# Altium PCB MSP430FR5739.PcbDoc
Units mm, origin at the board's own origin, x right, y up, seen from the top; angles counter-clockwise.
Board outline 25 x 25 mm, 6 copper layers (Top Layer, GroundPlane, RL1, RL2, PowerPlane, Bottom Layer); 24 components, 43 nets, 149 pads, 95 vias.
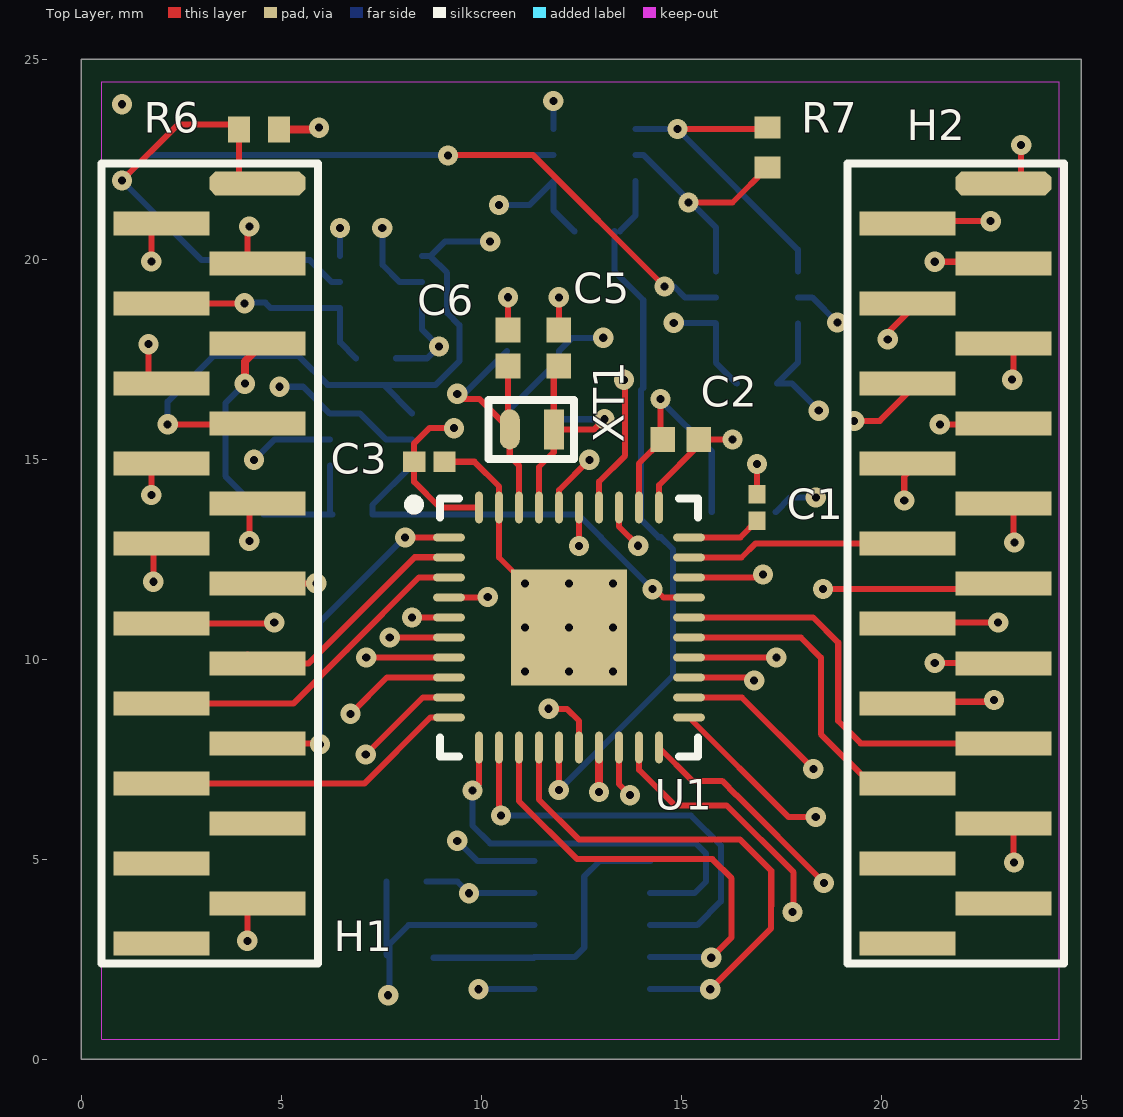
[diagram p0: Top Layer view]
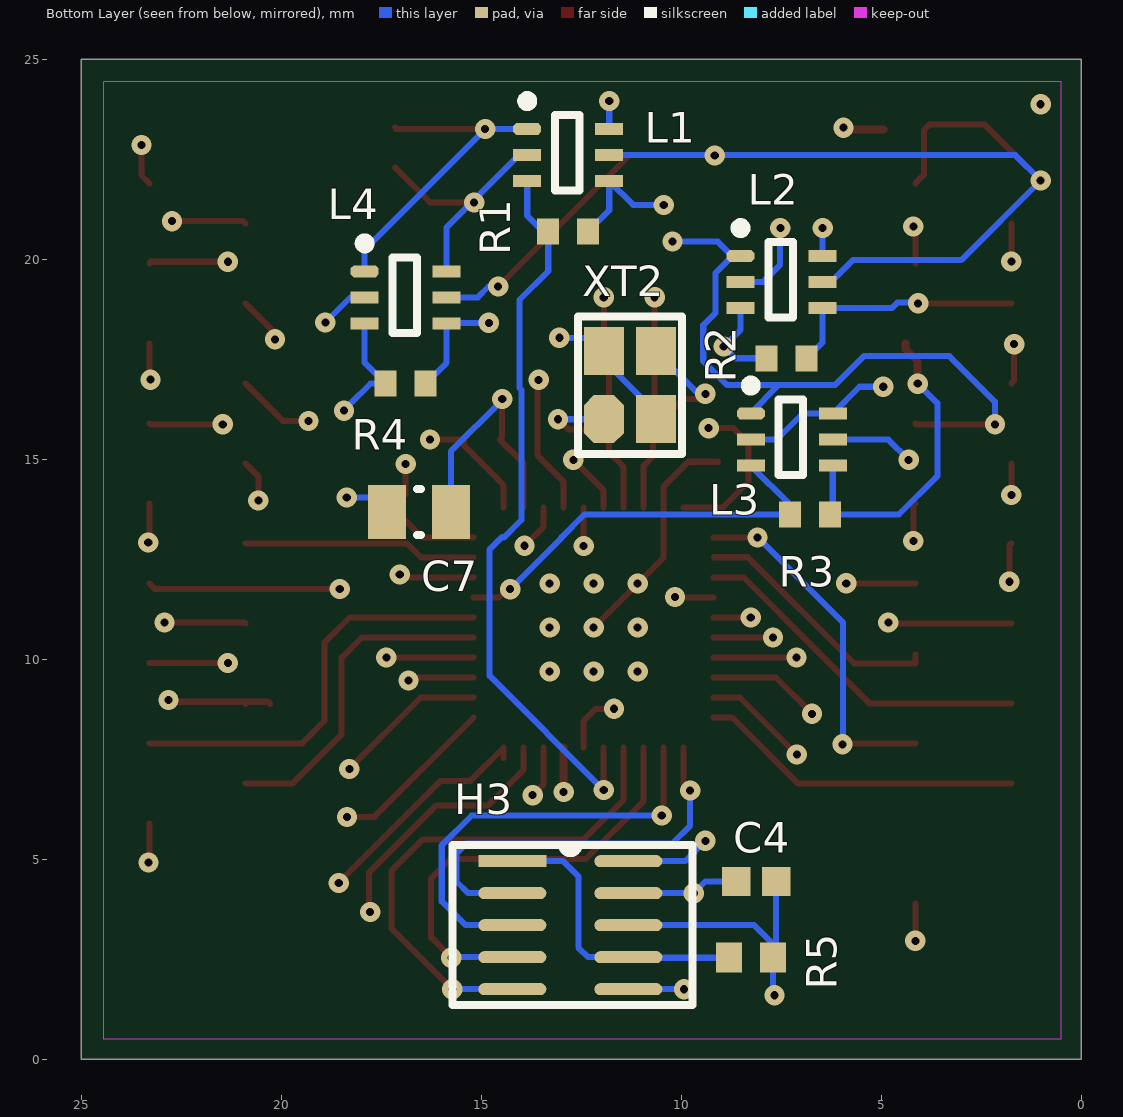
[diagram p1: Bottom Layer view, seen from below]
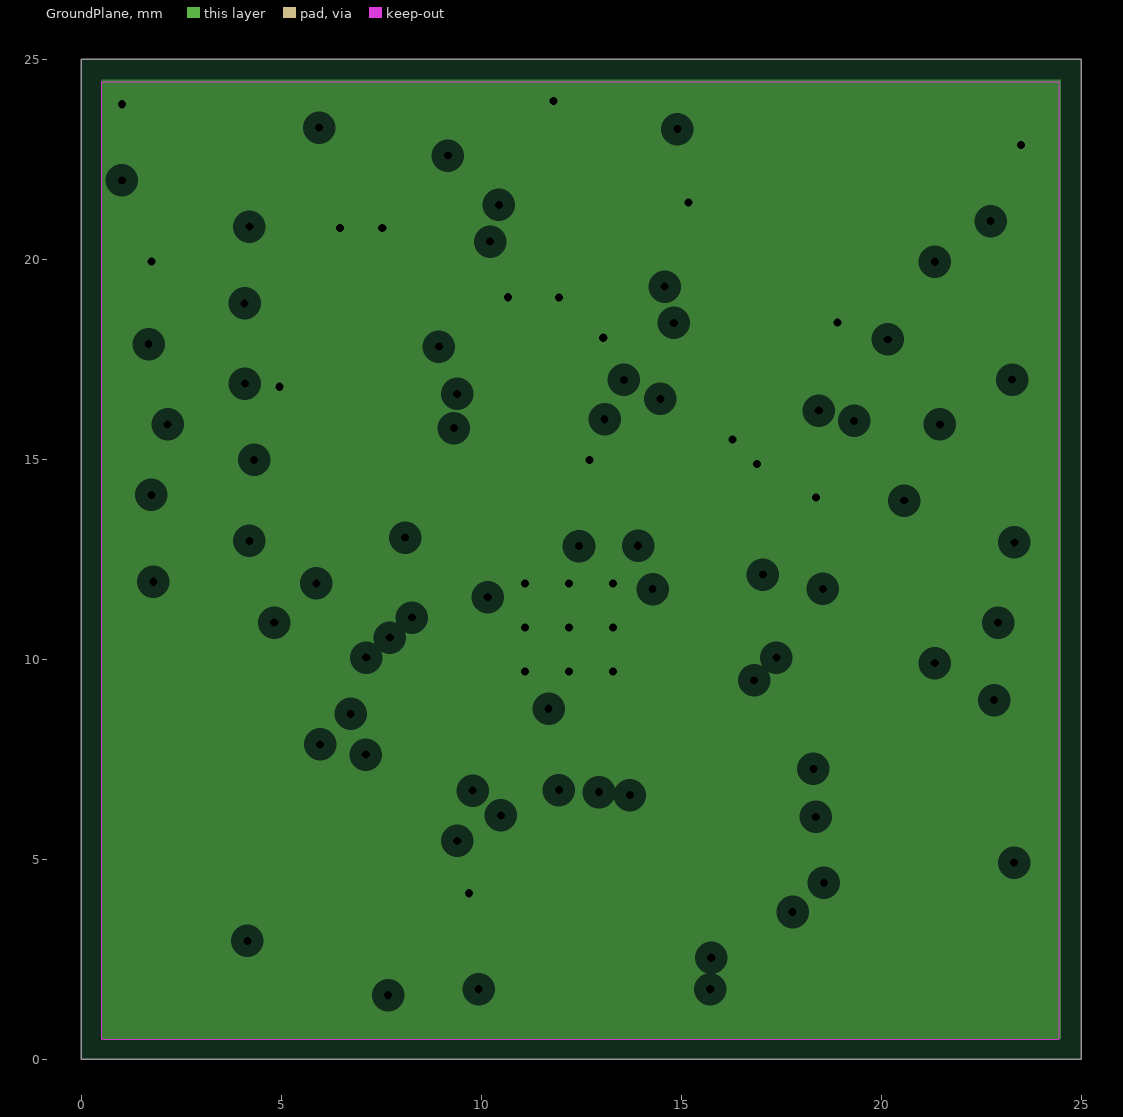
[diagram p2: GroundPlane, clearances drawn from the general rule]
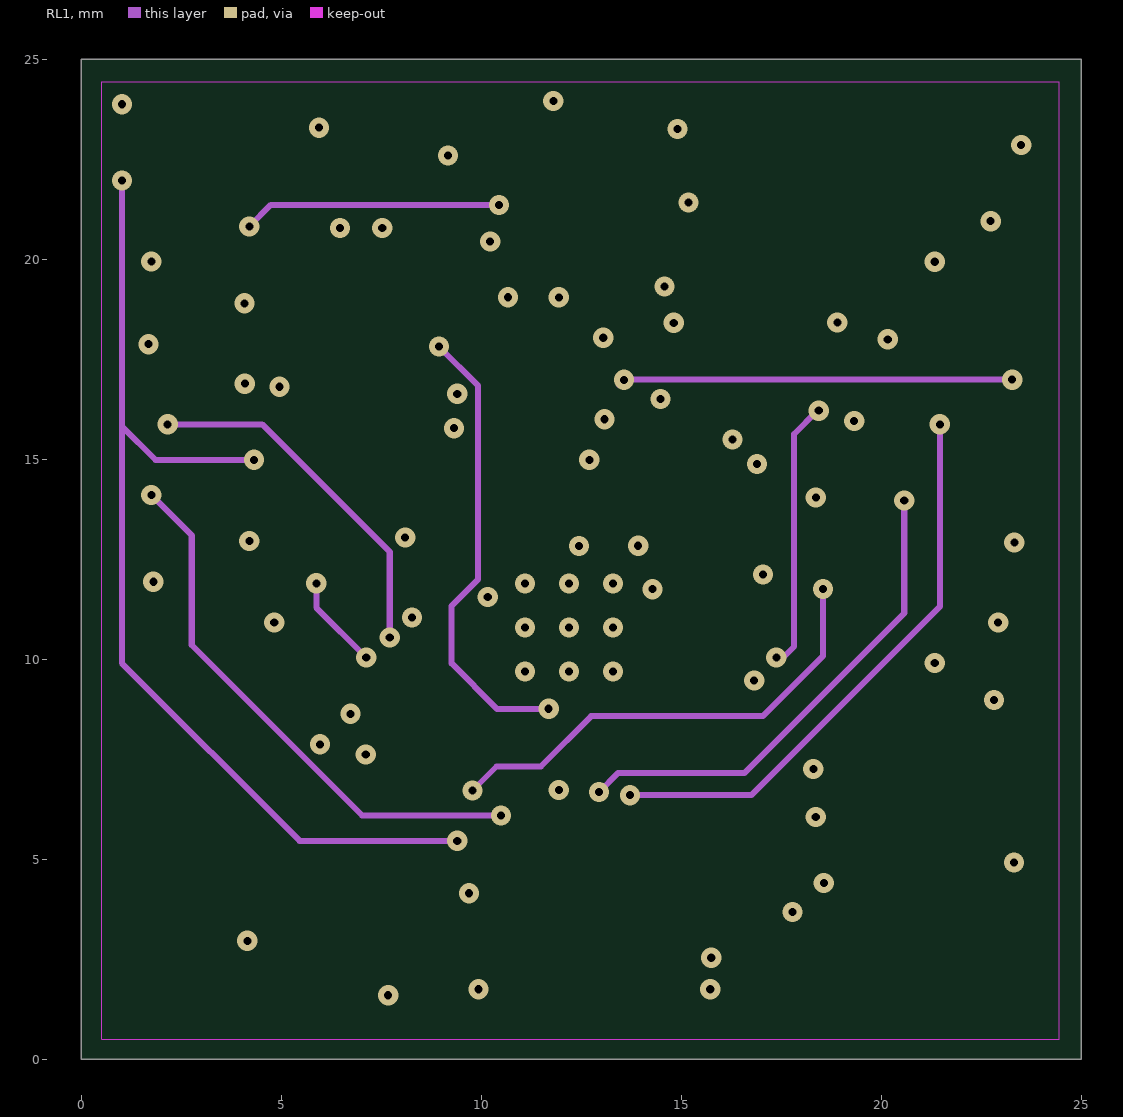
[diagram p3: RL1]
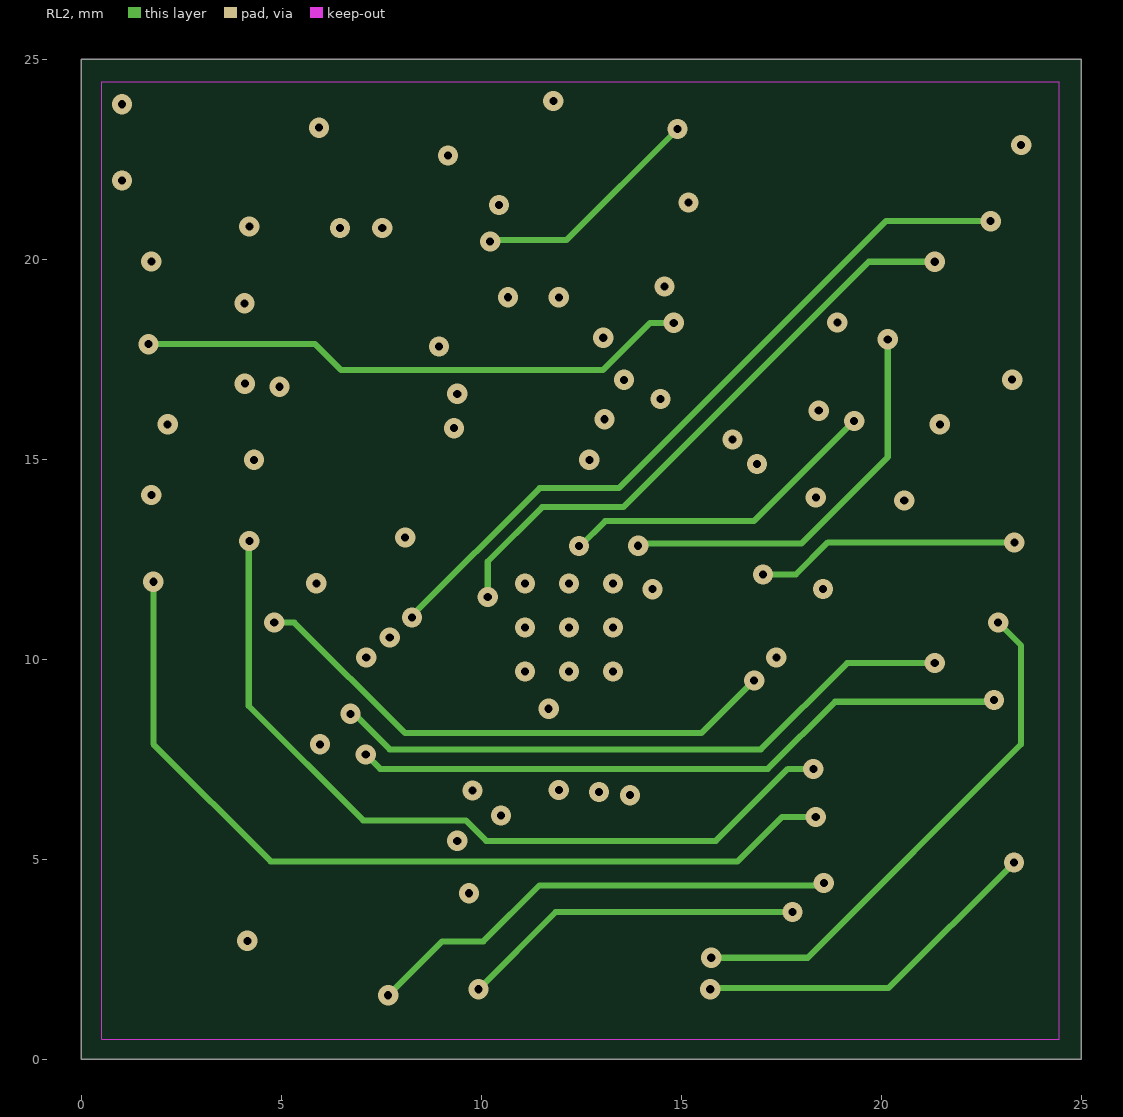
[diagram p4: RL2]
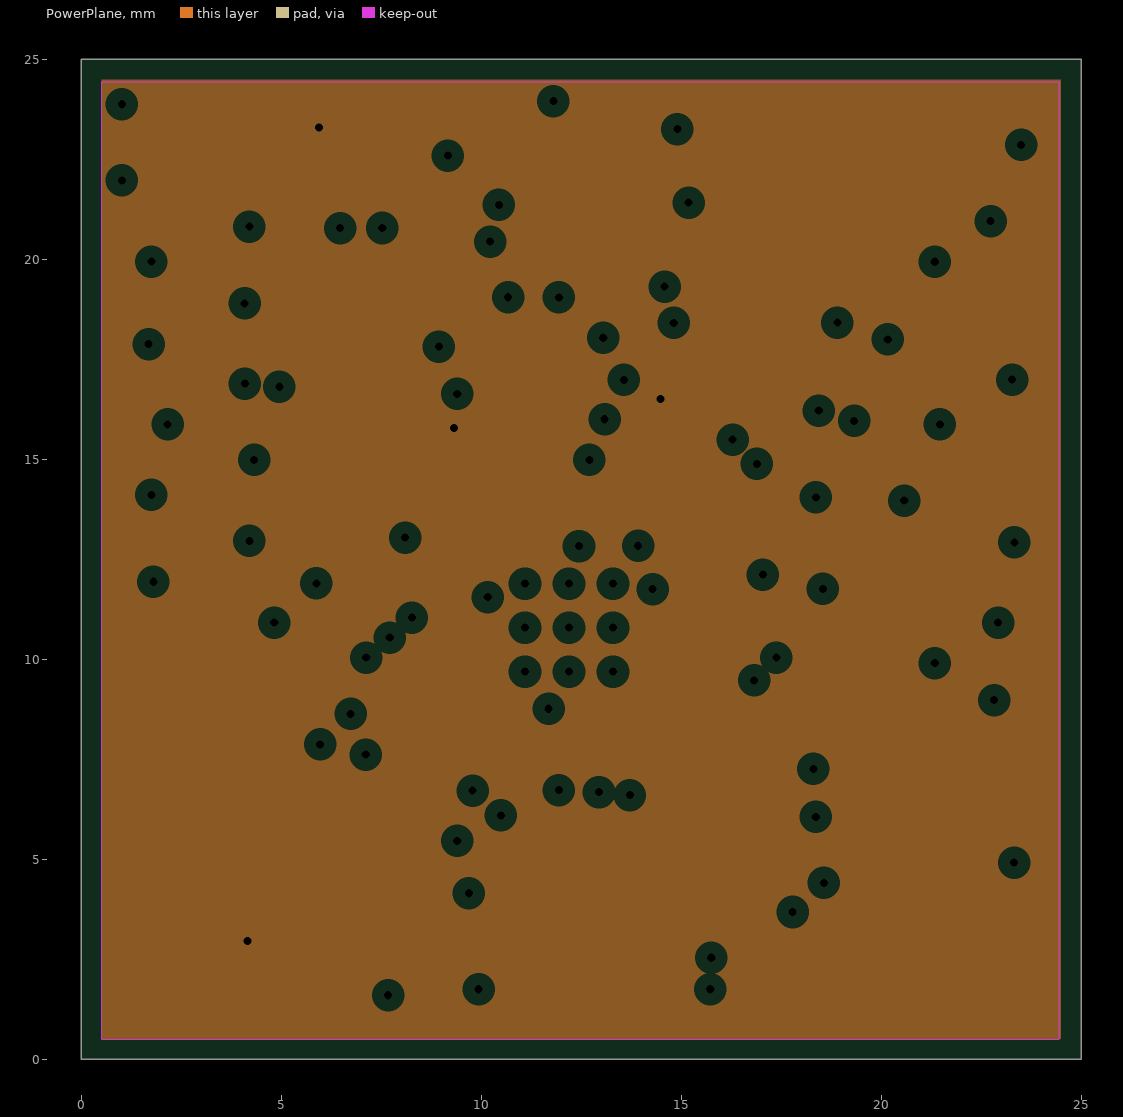
[diagram p5: PowerPlane, clearances drawn from the general rule]

## Layer stack, top to bottom
Top Layer: signal copper 0.0356
Dielectric: core 0.32, FR-4, Dk 4.8
GroundPlane: plane copper 0.0356, net GND
Dielectric: prepreg 0.32, FR-4, Dk 4.8
RL1: signal copper 0.0356
Dielectric: core 0.32, FR-4, Dk 4.8
RL2: signal copper 0.0356
Dielectric: prepreg 0.32, FR-4, Dk 4.8
PowerPlane: plane copper 0.0356, net VCC_MCU
Dielectric: core 0.32, FR-4, Dk 4.8
Bottom Layer: signal copper 0.0356

## Board outline
0,0 25,0 25,25 0,25

## Design rules (kind name [scope] priority, off if disabled: settings)
Clearance "Clearance~Sunstone Circuits" [All] p1: gap=0.152 // Sunstone Circuits Minimum Clearance Rule (MLB~4&6 Layer Designs)
HoleSize "HoleSize~Sunstone Circuits" [All] p1: absolutevalues=TRUE maxlimit=6.375 minlimit=0.203 maxpercent=80.000 minpercent=20.000 // Sunstone Circuits Hole Size Rule (MLB~4&6 Layer Designs)
HoleSize Testpoint [All] p2: absolutevalues=TRUE maxlimit=2.54 minlimit=0.025 maxpercent=80.000 minpercent=20.000
HoleSize TestPointUsage [All] p3: absolutevalues=TRUE maxlimit=2.54 minlimit=0.025 maxpercent=80.000 minpercent=20.000
MinimumAnnularRing "MinimumAnnularRing~Sunstone Circuits" [All] p1: minimumring=0.152 // Sunstone Circuits Minimum Annular Ring (MLB~4&6 Layer Designs)
MinimumSolderMaskSliver [All] p1: minsoldermaskwidth=0.076
PlaneClearance "PlaneClearance~Sunstone Circuits" [All] p1: clearance=0.305 // Sunstone Circuits Power Plane Clearance Rule (MLB~4&6 Layer Designs)
PlaneConnect "PlaneConnect~Sunstone Circuits" [All] p1: planeconnectstyle=Relief reliefexpansion=0.254 reliefentries=4 reliefconductorwidth=0.203 reliefairgap=0.254 // Sunstone Circuits Power Plane Connect Rule (MLB~4&6 Layer Designs)
PolygonConnect "PolygonConnect~Sunstone Circuits" [All] p1: connectstyle=Relief reliefconductorwidth=0.203 reliefentries=4 polygonreliefangle="90 Angle" airgapwidth=0.254 // Sunstone Circuits Polygon Connect Style (MLB~4&6 Layer Designs)
RoutingVias "RoutingVias~Sunstone Circuits" [All] p1: holewidth=0.203 width=0.508 viastyle="Through Hole" minholewidth=0.203 minwidth=0.508 maxholewidth=0.203 maxwidth=0.508 // Sunstone Circuits Routing Vias Rule (MLB~4&6 Layer Designs)
ShortCircuit "ShortCircuit~Sunstone Circuits" [All] p1: allowed=FALSE // Sunstone Circuits Short Circuit Rule~Do Not Allow (MLB~4&6 Layer Designs)
SolderMaskExpansion "SolderMaskExpansion~Sunstone Circuits" [All] p1: expansion=0.076 // Sunstone Circuits Solder Mask Expansion Rule (MLB~4&6 Layer Designs)
ViasUnderSMD "ViasUnderSMD~Sunstone Circuits" [All] p1: allowed=FALSE // Sunstone Circuits Vias Under SMD~Do Not Allow (MLB~4&6 Layer Designs)
Width "Width~Sunstone Circuits" [All] p1: maxlimit=2.54 minlimit=0.152 preferedwidth=0.254 // Sunstone Circuits Minimum Width Rule (MLB~4&6 Layer Designs)
23 further rules are at their usual default settings.

## Components (designator, comment, footprint, x,y, rotation, side; value= is the part's Value field where it differs from the comment)
C1 "CAP 220nF 4V 0201(0603)" CAPC0201(0603)33_N 16.891,13.792 r270 top
C2 "CAP 4.7uF 4V 0402(1005)" CAPC0402(1005)70_N 14.986,15.494 r180 top
C3 "CAP 100nF 4V 0201(0603)" CAPC0201(0603)33_M 8.7,14.94 r180 top
C4 "CAP 2.2uF 4V 0402(1005)" CAPC0402(1005)60_M 8.128,4.445 r180 bottom
C5 "CAP 470nF 4V 0402(1005)" CAPC0402(1005)60_N 11.938,17.78 r270 top
C6 "CAP 470nF 4V 0402(1005)" CAPC0402(1005)60_N 10.668,17.78 r270 top
C7 "CAP 0.5pF 10V 0805(2012)" CAPC0805(2012)75_L 16.56,13.68 r180 bottom
H1 "Bus_Header_1" "MALE SINGLE ROW 20 PIN HEADER" 2,21.9 r0 top
H2 "Bus_Header_2" "MALE SINGLE ROW 20 PIN HEADER" 20.65,21.9 r0 top
H3 "miniJTAG" SMT10PIN_MICRO 14.224,4.953 r180 bottom
L1 "NL17Sg373" SOT65P210X110-6N 12.827,22.606 r180 bottom
L2 "NL17Sg373" SOT65P210X110-6N 7.493,19.431 r180 bottom
L3 "NL17Sg373" SOT65P210X110-6N 7.239,15.494 r180 bottom
L4 "NL17Sg373" SOT65P210X110-6N 16.891,19.05 r180 bottom
R1 "1R 5% 0402(1005)" RESC0402(1005)_N 12.827,20.701 r0 bottom
R2 "1R 5% 0402(1005)" RESC0402(1005)_N 7.366,17.526 r0 bottom
R3 "1R 5% 0402(1005)" RESC0402(1005)_N 6.78,13.62 r0 bottom
R4 "1R 5% 0402(1005)" RESC0402(1005)_N 16.891,16.891 r0 bottom
R5 "47K 5% 0402(1005)" RESC0402(1005)_M 8.255,2.54 r180 bottom
R6 "1R 5% 0402(1005)" RESC0402(1005)_N 4.445,23.241 r180 top
R7 "1R 5% 0402(1005)" RESC0402(1005)_N 17.16,22.8 r270 top
U1 "MSP430FR5739IRHAR" Via_modified_TI-RHA40-2900X2900TP_N 12.192,10.795 r0 top
XT1 "XTAL" CRYSTAL_32 11.811,15.748 r180 top
XT2 "XTAL_4pin" CRYSTAL_MHZ 11.938,16.002 r90 bottom

## Footprints (in the part's own frame and the unit in brackets; to place one, negate y for a bottom-side part, rotate by r counter-clockwise, add the part's x,y. Pads: shape width x height; smd on the part's side, far side on the other; paste and mask are expansions set on the pad)
CAPC0201(0603)33_M [mm] "Chip Capacitor, Body 0.6x0.3mm, Height 0.33mm, IPC Low Density"
  rect 0.56x0.52 smd mask+0.102: 1(-0.38,0) 2(0.38,0)
  body extent -0.31,-0.17 0.32,0.16, height 0.33
CAPC0201(0603)33_N [mm] "Chip Capacitor, Body 0.6x0.3mm, Height 0.33mm, IPC Medium Density"
  rect 0.46x0.42 smd mask+0.102: 1(-0.33,0) 2(0.33,0)
  body extent -0.31,-0.16 0.32,0.17, height 0.33
CAPC0402(1005)60_M [mm] "Chip Capacitor, Body 1.0x0.5mm, Height 0.6mm, IPC Low Density"
  rect 0.72x0.72 smd: 1(-0.5,0) 2(0.5,0)
  body extent -0.55,-0.3 0.55,0.3, height 0.6
CAPC0402(1005)60_N [mm] "Chip Capacitor, Body 1.0x0.5mm, Height 0.6mm, IPC Medium Density"
  rect 0.62x0.62 smd: 1(-0.45,0) 2(0.45,0)
  body extent -0.55,-0.3 0.55,0.3, height 0.6
CAPC0402(1005)70_N [mm] "Chip Capacitor, Body 1.0x0.5mm, Height 0.7mm, IPC Medium Density"
  rect 0.62x0.62 smd: 1(-0.45,0) 2(0.45,0)
  body extent -0.55,-0.3 0.55,0.3, height 0.7
CAPC0805(2012)75_L [mm] "Chip Capacitor, Body 2.0x1.2mm, Height 0.75mm, IPC High Density"
  rect 0.95x1.35 smd: 1(-0.8,0) 2(0.8,0)
  silkscreen extent -0.05,-0.58 0.05,0.58, body extent -1.1,-0.72 1.1,0.72, height 0.75
CRYSTAL_32 [mm]
  rect 0.5x1 smd: 1(0,0)
  oval 0.5x1 smd: 2(1.1,0)
  silkscreen extent -0.51,-0.74 1.63,0.74
CRYSTAL_MHZ [mm]
  oct 1.2x1 smd: 1(0,0)
  rect 1.2x1 smd: 2(0,-1.3) 3(1.7,-1.3) 4(1.7,0)
  silkscreen extent -0.86,-1.95 2.57,0.65
"MALE SINGLE ROW 20 PIN HEADER" [mm]
  oct 2.4x0.6 smd: 1(2.4,0)
  rect 2.4x0.6 smd: 2(0,-1) 3(2.4,-2) 4(0,-3) 5(2.4,-4) 6(0,-5) 7(2.4,-6) 8(0,-7) 9(2.4,-8) 10(0,-9) 11(2.4,-10) 12(0,-11) 13(2.4,-12) 14(0,-13) 15(2.4,-14) 16(0,-15) 17(2.4,-16) 18(0,-17) 19(2.4,-18) 20(0,-19)
  silkscreen extent -1.5,-19.5 3.91,0.5
RESC0402(1005)_M [mm] "Chip Resistor, Body 1.0x0.5mm, IPC Low Density"
  rect 0.65x0.75 smd: 1(-0.55,0) 2(0.55,0)
  body extent -0.52,-0.28 0.53,0.28, height 0.4
RESC0402(1005)_N [mm] "Chip Resistor, Body 1.0x0.5mm, IPC Medium Density"
  rect 0.55x0.65 smd: 1(-0.5,0) 2(0.5,0)
  body extent -0.52,-0.27 0.53,0.28, height 0.4
SMT10PIN_MICRO [mm]
  rect 1.7x0.3 smd: 1(0,0)
  oval 1.7x0.3 smd: 2(0,-0.8) 3(0,-1.6) 4(0,-2.4) 5(0,-3.2) 6(2.9,-3.2) 7(2.9,-2.4) 8(2.9,-1.6) 9(2.9,-0.8) 10(2.9,0)
  silkscreen extent -1.5,-3.6 4.5,0.4
SOT65P210X110-6N [mm] "SOT23, 6-Leads, Body 2.00x2.10mm, Pitch 0.65mm, IPC Medium Density"
  oct 0.7x0.3 smd: 1(-1.025,0.65)
  rect 0.7x0.3 smd: 2(-1.025,0) 3(-1.025,-0.65) 4(1.025,-0.65) 5(1.025,0) 6(1.025,0.65)
  silkscreen extent -1.15,-0.89 0.28,1.47, body extent -0.67,-1.1 0.67,1.1, height 1.1
Via_modified_TI-RHA40-2900X2900TP_N [mm] "QFN, 40-Leads, Body 6x6mm, Pitch 0.5mm, Thermal Pad 2.9x2.9mm, IPC Medium Density"
  oval 0.8x0.2 smd: 1(-3,2.25) 2(-3,1.75) 3(-3,1.25) 4(-3,0.75) 5(-3,0.25) 6(-3,-0.25) 7(-3,-0.75) 8(-3,-1.25) 9(-3,-1.75) 10(-3,-2.25) 21(3,-2.25) 22(3,-1.75) 23(3,-1.25) 24(3,-0.75) 25(3,-0.25) 26(3,0.25) 27(3,0.75) 28(3,1.25) 29(3,1.75) 30(3,2.25)
  oval 0.2x0.8 smd: 11(-2.25,-3) 12(-1.75,-3) 13(-1.25,-3) 14(-0.75,-3) 15(-0.25,-3) 16(0.25,-3) 17(0.75,-3) 18(1.25,-3) 19(1.75,-3) 20(2.25,-3) 31(2.25,3) 32(1.75,3) 33(1.25,3) 34(0.75,3) 35(0.25,3) 36(-0.25,3) 37(-0.75,3) 38(-1.25,3) 39(-1.75,3) 40(-2.25,3)
  rect 2.9x2.9 smd: 41(0,0)
  silkscreen extent -4,-3.22 3.22,3.22, body extent -3.08,-3.08 3.08,3.08, height 1

## Part data
C1: library part CMP-1033-00669-1, "CAP 220nF 4V ±20% 0201 (0603 Metric) Thickness 0.33mm SMD"
C2: library part CMP-1034-02135-1, "CAP 10uF 4V ±20% 0402 (1005 Metric) Thickness 0.7mm SMD"
C3: library part CMP-1033-00657-1, "CAP 100nF 4V ±10% 0201 (0603 Metric) Thickness 0.33mm SMD"
C4: library part CMP-1034-02124-1, "CAP 2.2uF 4V ±20% 0402 (1005 Metric) Thickness 0.6mm SMD"
C5 C6: library part CMP-1034-02101-1, "CAP 470nF 4V ±10% 0402 (1005 Metric) Thickness 0.6mm SMD"
C7: library part CMP-1036-00001-1, "CAP 0.5pF 10V ±0.1pF 0805 (2012 Metric) Thickness 0.75mm SMD"
R1 R2 R3 R4 R6 R7: library part CMP-1011-00002-1, "1R 0.063W 5% 0402 (1005 Metric)  SMD"
R5: library part CMP-1011-00114-1, "47K 0.063W 5% 0402 (1005 Metric)  SMD"
U1: library part CMP-0365-01094-1, "24 MHz Mixed Signal Microcontroller, 1024 B SRAM and 33 GPIOs, -40 to 85 degC, 40-pin QFN (RHA), Green (RoHS & no Sb/Br)"

## Via types
v1: diameter 0.508, hole 0.203, Top Layer to Bottom Layer, 95 vias

## Nets (pads, with @x,y where several pads share a name; then routed paths per layer and width w, separated by ;. In a path a pad name is that pad's centre, name@x,y a point inside that pad or via, vN(x,y) a via of type N, cw(c..) or ccw(c..) an arc to the next point about the centre after c; other vN are vias at no path point)
EH_VCC: H1.1 H3.10 L1.5 L2.5 L3.5 L4.5 R6.2 | length 60.9
  Top Layer w0.152: v1(1.016,21.971) 2.413,23.368 3.802,23.368 3.937,23.233 3.937,22.113 H1.1@4.15,21.9 ; v1(9.166,22.595) 9.175,22.604 11.296,22.604 v1(14.58,19.32)
  RL1 w0.152: v1(1.016,21.971) 1.016,15.824 ; v1(4.318,14.986) 1.854,14.986 1.016,15.824 ; v1(9.398,5.461) 5.461,5.461 1.016,9.906 1.016,15.824
  Bottom Layer w0.152: v1(4.318,14.986) 4.826,15.494 L3.5 ; L2.5 6.261,19.431 5.712,19.98 3.007,19.98 v1(1.016,21.971) 1.651,22.606 L1.5 ; v1(9.398,5.461) 9.906,4.953 H3.10 ; v1(14.58,19.32) 14.82,19.32 15.09,19.05 L4.5
GND: C1.1 C2.1 C3.1 C4.1 C5.1 C6.1 C7.1 H1.2 H2.1 H3.9 L1.2 L1.6 L2.2 L2.6 L3.2 L3.6 L4.2 L4.6 R7.2 U1.31 U1.36 U1.39 U1.41 XT2.2 XT2.4 | length 37.6
  Top Layer w0.152: v1(1.75,19.944) H1.2@1.75,20.9 ; v1(6.468,20.781) v1@6.523,20.836 ; C3.1 9.825,14.94 10.442,14.323 U1.39 10.442,12.545 v1(11.092,11.895) v1(12.192,10.795) ; C6.1 v1(10.668,19.052) ; C5.1 v1(11.938,19.048) ; U1.36 11.942,14.228 v1(12.7,14.986) ; U1.31 14.442,14.356 15.436,15.35 C2.1 v1(16.281,15.494) ; v1(15.18,21.42) 16.28,21.42 R7.2 ; C1.1 16.891,14.681 v1(16.891,14.884) ; v1@18.313,14.046 v1(18.364,14.046) ; H2.1@23.3,21.9 23.495,22.095 v1(23.495,22.86)
  RL1 w0.152: v1@10.666,19.054 v1(10.668,19.052) ; v1@11.887,19.099 v1(11.938,19.048) ; v1(16.891,14.884) v1@16.916,14.91
  Bottom Layer w0.152: v1(4.953,16.815) 5.543,16.815 ; 5.558,16.8 L3.6 6.97,16.144 7.62,15.494 L3.2 ; L2.6 v1(6.468,20.781) ; v1(7.523,20.783) 7.53,20.776 7.53,19.863 7.962,19.431 L2.2 ; C4.1 9.398,4.445 v1(9.69,4.153) H3.9 ; XT2.2 10.638,16.178 11.938,17.478 XT2.4 12.272,18.036 v1@13.233,18.036 ; L1.6 v1(11.802,23.956) ; v1(13.049,18.038) v1@13.231,18.038 ; L1.2 14.059,22.606 15.866,20.799 L4.6 ; C7.1 17.726,14.046 v1(18.364,14.046) ; L4.2 18.27,19.05 v1(18.9,18.42)
  other v1: 11.092,9.695 12.192,9.695 13.292,9.695 11.092,10.795 13.292,10.795 12.192,11.895 13.292,11.895 1.016,23.876
N10: H1.15 U1.1 | length 9.5
  Top Layer w0.152: H1.15@4.15,7.9 H1.15 5.943,7.9 v1(5.969,7.874) ; v1@8.293,13.045 U1.1
  Bottom Layer w0.152: v1(5.969,7.874) 5.962,7.881 5.962,10.924 7.998,12.96 8.16,12.96 8.235,13.035 8.25,13.035 8.218,13.067 7.995,13.067 8.076,12.985 8.149,12.985 8.1,13.034 8.1,13.039 v1(8.095,13.044)
N11: H1.13 U1.2 | length 6.4
  Top Layer w0.152: H1.13@4.15,10.119 4.15,9.9 H1.13 5.683,9.9 8.335,12.552 U1.2@9.185,12.552
N12: H1.14 U1.3 | length 8.8
  Top Layer w0.152: H1.14@1.75,8.9 H1.14 5.306,8.9 6.64,10.234 6.64,10.245 8.44,12.045 U1.3
N13: H2.13 U1.8 | length 20.7
  Top Layer w0.152: v1(6.731,8.636) 7.64,9.545 U1.8 ; v1(21.336,9.906) H2.13@23.294,9.906
  RL2 w0.152: v1(6.731,8.636) 6.821,8.636 7.71,7.747 16.987,7.747 19.146,9.906 v1(21.336,9.906)
N14: H2.14 U1.9 | length 22.5
  Top Layer w0.152: v1(7.112,7.62) 8.537,9.045 U1.9 ; H2.14@20.28,8.89 20.33,8.94 20.65,8.94 22.98,8.94 22.939,8.981 v1(22.819,8.981) ; H2.14@20.89,8.89 H2.14@20.9,8.9
  RL2 w0.152: v1(7.112,7.62) 7.472,7.26 17.166,7.26 18.846,8.94 22.98,8.94 22.939,8.981 v1(22.819,8.981)
N15: H1.16 U1.10 | length 8.1
  Top Layer w0.152: H1.16@1.75,6.9 H1.16 7.084,6.9 8.729,8.545 U1.10
N16: H2.9 U1.28 | length 9.5
  Top Layer w0.152: U1.28 16.965,12.045 v1(17.04,12.12) ; H2.9@23.3,13.9 23.3,12.948 v1(23.326,12.922)
  RL2 w0.152: v1(17.04,12.12) 17.86,12.12 18.662,12.922 v1@23.313,12.922 ; v1(23.326,12.922) v1@23.313,12.922 ; v1@23.351,12.96 v1@23.313,12.922
N17: H2.10 U1.29 | length 5.9
  Top Layer w0.152: U1.29 16.505,12.545 16.86,12.9 H2.10 H2.10@20.9,12.9
N20: H1.10 U1.21 | length 27.5
  Top Layer w0.152: H1.10@1.75,12.9 1.8,12.85 v1(1.8,11.94) ; U1.21 17.677,6.06 v1(18.36,6.06)
  RL2 w0.152: v1(1.8,11.94) 1.8,7.882 4.733,4.949 16.409,4.949 17.52,6.06 v1(18.36,6.06)
N21: H1.9 U1.22 | length 25.2
  Top Layer w0.152: H1.9@4.15,13.9 4.2,13.85 v1(4.2,12.96) ; U1.22 16.515,9.045 v1(18.3,7.26)
  RL2 w0.152: v1(4.2,12.96) 4.187,12.947 4.187,8.833 7.047,5.973 9.61,5.973 10.124,5.46 15.864,5.46 17.664,7.26 v1(18.3,7.26)
N22: H1.12 U1.23 | length 18.5
  Top Layer w0.152: H1.12@1.75,10.9 H1.12 4.594,10.9 4.699,10.795 v1(4.823,10.919) ; U1.23 16.6,9.545 16.672,9.472 v1(16.82,9.472)
  RL2 w0.152: v1(4.823,10.919) 5.329,10.919 8.095,8.153 15.501,8.153 v1(16.82,9.472)
N23: H2.5 U1.34 | length 14.6
  Top Layer w0.152: U1.34 12.942,14.442 13.593,15.093 13.593,16.767 13.5,16.86 13.44,16.86 v1(13.566,16.986) ; v1@23.3,17 H2.5@23.3,17.9
  RL1 w0.152: v1(13.566,16.986) 13.44,16.86 13.5,16.86 13.633,16.993 v1(23.27,16.993)
N24: H2.6 U1.35 | length 11.1
  Top Layer w0.152: v1(12.442,12.831) U1.35 ; v1(19.32,15.96) 19.96,15.96 H2.6@20.9,16.9
  RL2 w0.152: v1@12.48,12.84 13.094,13.454 16.814,13.454 v1(19.32,15.96)
N25: H2.8 U1.17 | length 14.5
  Top Layer w0.152: v1(20.574,13.97) 20.574,14.574 H2.8@20.9,14.9
  Top Layer w0.2: v1(12.942,6.682) U1.17
  RL1 w0.152: v1(12.942,6.682) 13.421,7.161 16.581,7.161 20.574,11.154 v1(20.574,13.97)
  RL1 w0.2: v1(12.942,6.682) v1@12.968,6.656
N26: H2.7 U1.18 | length 17.4
  Top Layer w0.152: U1.18 13.442,6.878 v1(13.716,6.604) ; v1(21.463,15.875) 23.275,15.875 H2.7@23.3,15.9
  RL1 w0.152: v1(13.716,6.604) 16.749,6.604 21.463,11.318 v1(21.463,15.875)
N27: H2.4 U1.33 | length 12.5
  Top Layer w0.152: U1.33 13.442,13.318 v1(13.92,12.84) ; v1(20.16,18) 20.16,18.16 H2.4@20.9,18.9
  RL2 w0.152: v1(13.92,12.84) 13.972,12.892 17.998,12.892 20.16,15.055 v1(20.16,18)
N30: H2.3 U1.4 | length 18.1
  Top Layer w0.152: U1.4 10.148,11.545 v1(10.16,11.557) ; v1(21.336,19.939) 23.261,19.939 H2.3@23.3,19.9
  RL2 w0.152: v1(10.16,11.557) 10.16,12.446 11.52,13.806 13.552,13.806 19.685,19.939 v1(21.336,19.939)
N31: H2.2 U1.5 | length 21.4
  Top Layer w0.152: v1(8.266,11.045) U1.5 ; H2.2@20.9,20.9 20.955,20.955 v1(22.733,20.955)
  RL2 w0.152: v1(8.266,11.045) 8.266,11.085 11.46,14.28 13.44,14.28 20.115,20.955 v1(22.733,20.955)
N32: H1.7 L1.1 L2.1 L3.1 L4.1 R7.1 U1.6 | length 41.3
  Top Layer w0.152: v1(2.159,15.875) 4.125,15.875 H1.7@4.15,15.9 ; v1(7.71,10.545) U1.6 ; v1(14.904,23.256) 17.116,23.256 R7.1
  RL1 w0.152: v1(2.159,15.875) 4.52,15.875 7.71,12.685 v1(7.71,10.545) v1@7.634,10.469
  RL2 w0.152: v1(10.222,20.444) 10.184,20.444 10.221,20.481 12.129,20.481 v1(14.904,23.256)
  Bottom Layer w0.152: v1(2.159,15.875) 2.159,16.439 3.3,17.58 5.435,17.58 6.155,16.86 7.56,16.86 ; L3.1 8.264,16.156 7.56,16.86 ; L2.1 L2.1@8.725,20.081 ; v1(10.222,20.444) 9.088,20.444 L2.1@8.725,20.081 ; L1.1 v1(14.904,23.256) 17.916,20.244 L4.1 ; 7.56,16.86 8.859,16.86 9.452,17.453 9.452,18.354 9.144,18.663 9.144,19.662 L2.1@8.725,20.081
N33: H1.11 U1.7 | length 6.2
  Top Layer w0.152: H1.11@4.15,11.9 H1.11 v1(5.875,11.9) ; v1(7.122,10.045) U1.7
  RL1 w0.152: v1(5.875,11.9) 5.875,11.292 v1(7.122,10.045)
N34: H1.6 L4.4 R4.1 | length 17.7
  Top Layer w0.152: v1(1.68,17.88) 1.68,16.97 H1.6@1.75,16.9
  RL2 w0.152: v1(1.68,17.88) 5.845,17.88 6.497,17.229 13.038,17.229 14.219,18.41 v1(14.81,18.41)
  Bottom Layer w0.152: v1(14.81,18.41) L4.4@15.856,18.41 ; L4.4 15.866,17.416 R4.1
N35: H2.16 U1.25 | length 8.3
  Top Layer w0.152: U1.25 17.985,10.545 18.491,10.039 18.491,8.128 19.719,6.9 H2.16 H2.16@20.9,6.9
N36: H2.15 U1.26 | length 10.6
  Top Layer w0.152: U1.26 18.295,11.045 18.923,10.417 18.923,8.458 19.481,7.9 H2.15 H2.15@23.3,7.9
N37: H1.5 L3.4 R3.1 | length 8
  Top Layer w0.2: v1(4.089,16.891) 4.089,17.45 4.4,17.76 H1.5
  Bottom Layer w0.152: v1(4.089,16.891) 3.6,16.402 3.6,14.58 4.56,13.62 R3.1 6.214,13.686 L3.4
N40: H1.3 L1.4 R1.1 | length 10.5
  Top Layer w0.152: H1.3@4.15,19.9 4.15,20.77 v1(4.2,20.82)
  RL1 w0.152: v1(4.2,20.82) 4.74,21.36 v1(10.44,21.36)
  Bottom Layer w0.152: v1(10.44,21.36) 11.206,21.36 L1.4 11.802,21.226 R1.1
N41: H1.4 L2.4 R2.1 | length 6.3
  Top Layer w0.152: H1.4@1.75,18.9 H1.4 v1(4.08,18.9)
  Bottom Layer w0.152: v1(4.08,18.9) v1@4.198,18.782 ; v1@4.098,18.918 4.599,18.918 4.736,18.781 L2.4 6.468,17.924 R2.1
N42: H2.11 H3.2 U1.11 | length 27
  Top Layer w0.152: v1(9.78,6.72) 9.942,6.882 U1.11 ; v1(18.54,11.76) 23.16,11.76 H2.11@23.3,11.9
  RL1 w0.152: v1(9.78,6.72) 10.38,7.32 11.486,7.32 12.746,8.58 17.04,8.58 18.54,10.08 v1(18.54,11.76)
  Bottom Layer w0.152: v1(9.78,6.72) 9.78,5.841 10.221,5.4 15.36,5.4 15.621,5.139 15.621,4.445 15.329,4.153 H3.2
N43: H1.8 H3.3 U1.12 | length 25
  Top Layer w0.152: v1@1.68,14.04 v1(1.75,14.11) H1.8@1.75,14.9 ; 10.442,6.358 U1.12
  RL1 w0.152: v1(1.75,14.11) 2.76,13.1 2.76,10.358 7.022,6.096 v1(10.49,6.096) v1@10.541,6.096
  Bottom Layer w0.152: v1@10.704,6.096 15.24,6.096 15.988,5.348 15.988,3.949 15.393,3.353 H3.3
N44: H2.12 H3.4 U1.13 | length 26.4
  Top Layer w0.152: U1.13 10.942,6.457 12.395,5.004 15.773,5.004 16.256,4.521 16.256,3.048 v1(15.748,2.54) ; H2.12@20.9,10.9 20.92,10.92 v1(22.92,10.92)
  RL2 w0.152: v1(15.748,2.54) 18.161,2.54 23.492,7.871 23.492,10.348 v1(22.92,10.92)
  Bottom Layer w0.152: H3.4 15.735,2.553 v1(15.748,2.54)
N45: H2.17 H3.5 U1.14 | length 22.9
  Top Layer w0.152: U1.14 11.442,6.492 12.437,5.497 16.465,5.497 17.248,4.714 17.248,3.834 17.247,3.833 17.247,3.277 v1(15.723,1.753) ; v1@23.3,4.939 H2.17@23.3,5.9 ; v1(23.319,4.92) v1@23.46,4.92
  RL2 w0.152: v1@15.749,1.779 20.178,1.779 v1(23.319,4.92)
  Bottom Layer w0.152: H3.5 v1(15.723,1.753)
N46: C5.2 U1.37 XT1.1 XT2.1 | length 6.3
  Top Layer w0.152: U1.37 11.442,14.808 11.811,15.177 XT1.1 ; C5.2 11.811,17.203 XT1.1 ; v1(13.081,16.002) 12.827,15.748 XT1.1
  Bottom Layer w0.152: XT2.1 v1(13.081,16.002)
N47: C6.2 U1.38 XT1.2 XT2.3 | length 7
  Top Layer w0.152: v1(9.398,16.637) 9.525,16.51 9.949,16.51 XT1.2@10.668,15.791 ; C6.2 XT1.2@10.668,15.791 ; U1.38 10.942,14.839 10.711,15.07 XT1.2 XT1.2@10.668,15.791
  Bottom Layer w0.152: v1(9.398,16.637) 9.573,16.637 XT2.3
PN34: L4.3 R4.2 U1.24 | length 11.8
  Top Layer w0.152: U1.24 v1(17.375,10.045)
  RL1 w0.152: v1(17.375,10.045) 17.46,9.96 17.82,10.32 17.82,15.613 ; 17.819,15.633 18.402,16.216 v1(18.435,16.216)
  Bottom Layer w0.152: L4.3 17.916,17.416 R4.2 17.771,16.891 v1@18.276,16.386
PN37: L3.3 R3.2 U1.27 | length 10.4
  Top Layer w0.152: v1(14.28,11.755) 14.345,11.755 14.555,11.545 U1.27
  Bottom Layer w0.152: L3.3 7.28,13.86 R3.2 12.425,13.62 12.992,13.052 12.992,13.043 v1(14.28,11.755)
PN40: L1.3 R1.2 U1.15 | length 18.3
  Top Layer w0.152: v1(11.938,6.731) 11.942,6.735 U1.15
  RL1 w0.152: v1(11.938,6.731) 11.954,6.731 v1@11.962,6.723
  Bottom Layer w0.152: v1(11.938,6.731) 14.792,9.585 14.792,12.748 14.488,13.052 14.432,13.052 13.995,13.489 13.995,16.733 14.049,16.786 14.049,18.983 13.327,19.705 R1.2 ; R1.2@13.462,20.701 13.852,21.091 L1.3
PN41: L2.3 R2.2 U1.16 | length 15.4
  Top Layer w0.152: v1(11.684,8.763) 12.14,8.763 12.442,8.461 U1.16
  RL1 w0.152: v1(8.94,17.82) 9.92,16.84 9.92,11.999 9.258,11.337 9.258,9.897 10.391,8.763 v1(11.684,8.763) v1@11.68,8.767
  Bottom Layer w0.152: R2.2 8.646,17.526 v1(8.94,17.82) 8.518,18.242 L2.3
RST: C4.2 H3.8 R5.2 U1.20 | length 24.8
  Top Layer w0.152: U1.20@14.442,7.529 U1.20 15.277,6.96 16.018,6.96 16.373,6.604 16.383,6.604 v1@18.479,4.508
  RL2 w0.152: v1(7.671,1.6) 9.018,2.948 10.053,2.948 11.451,4.346 18.502,4.346 v1(18.564,4.408)
  Bottom Layer w0.152: C4.2 7.628,2.617 R5.2 ; v1(7.671,1.6) 7.705,1.634 R5.2 ; H3.8 8.179,3.353 7.705,2.879 R5.2
TST: H3.6 U1.19 | length 16.6
  Top Layer w0.152: v1@9.906,1.778 v1(9.931,1.753) ; U1.19 13.942,7.239 14.831,6.35 16.129,6.35 17.805,4.674 17.805,3.708 v1(17.78,3.683)
  RL2 w0.152: v1(9.931,1.753) 11.861,3.683 v1(17.78,3.683)
  Bottom Layer w0.152: v1(9.931,1.753) H3.6
UIF_VCC: H3.1 H3.7 R5.1 | length 7.5
  Bottom Layer w0.152: R5.1 11.311,2.54 H3.7 12.332,2.553 12.573,2.794 12.573,4.572 12.954,4.953 H3.1
VCC_MCU: C2.2 C3.2 C7.2 H1.19 R6.1 U1.32 U1.40 | length 12.8
  Top Layer w0.152: v1(4.15,2.962) H1.19@4.15,3.9 ; v1@9.398,15.862 v1(9.316,15.78) 8.7,15.78 8.32,15.4 C3.2 8.32,14.438 8.963,13.795 U1.40 ; U1.32 13.942,14.9 C2.2 14.478,15.552 v1(14.478,16.51) ; v1@14.53,16.51 v1(14.478,16.51) ; v1@14.588,16.62 v1(14.478,16.51)
  Top Layer w0.2: R6.1 v1@5.893,23.241
  RL1 w0.152: v1(4.15,2.962) v1@4.191,2.921
  Bottom Layer w0.152: v1@14.53,16.51 v1(14.478,16.51) ; v1@14.588,16.62 v1(14.478,16.51) ; C7.2 15.76,15.2 14.478,16.482 v1(14.478,16.51)
  other v1: 5.944,23.292
VCORE: C1.2 U1.30 | length 1.9
  Top Layer w0.152: U1.30 16.474,13.045 C1.2
pads on no net: H1.17 H1.18 H1.20 H2.18 H2.19 H2.20

## Polygon pours and split planes (outlines as drawn)
GND on GroundPlane (split plane): 24.49,0.51 0.51,0.51 0.51,24.49 24.49,24.49
VCC_MCU on PowerPlane (split plane): 24.49,0.51 0.51,0.51 0.51,24.49 24.49,24.49

## Keep-outs
Keep-Out Layer:
  lines w0.025: 0.508,0.508 24.445,0.508 24.445,24.445 0.508,24.445 0.508,0.508

## Silkscreen, mask and mechanical layers (free items; w line width, h text height)
Mechanical 3:
  the board outline again, w0.254

## Dimensions
0,0 to 25,0 on Mechanical 1
-0.06,0 to 0,25 on Mechanical 1